# Altium PCB True Variant.PcbDoc
Units mil, origin at the board's own origin, x right, y up, seen from the top; angles counter-clockwise.
Board outline 6000 x 4000 mil, 4 copper layers (Top Layer, Int1 (GND), Int2 Neutral, Bottom Layer), stack 56.912 mil thick; 17 components, 12 nets, 44 pads, 0 vias.
Unrouted connection lines stored in the file: 1.
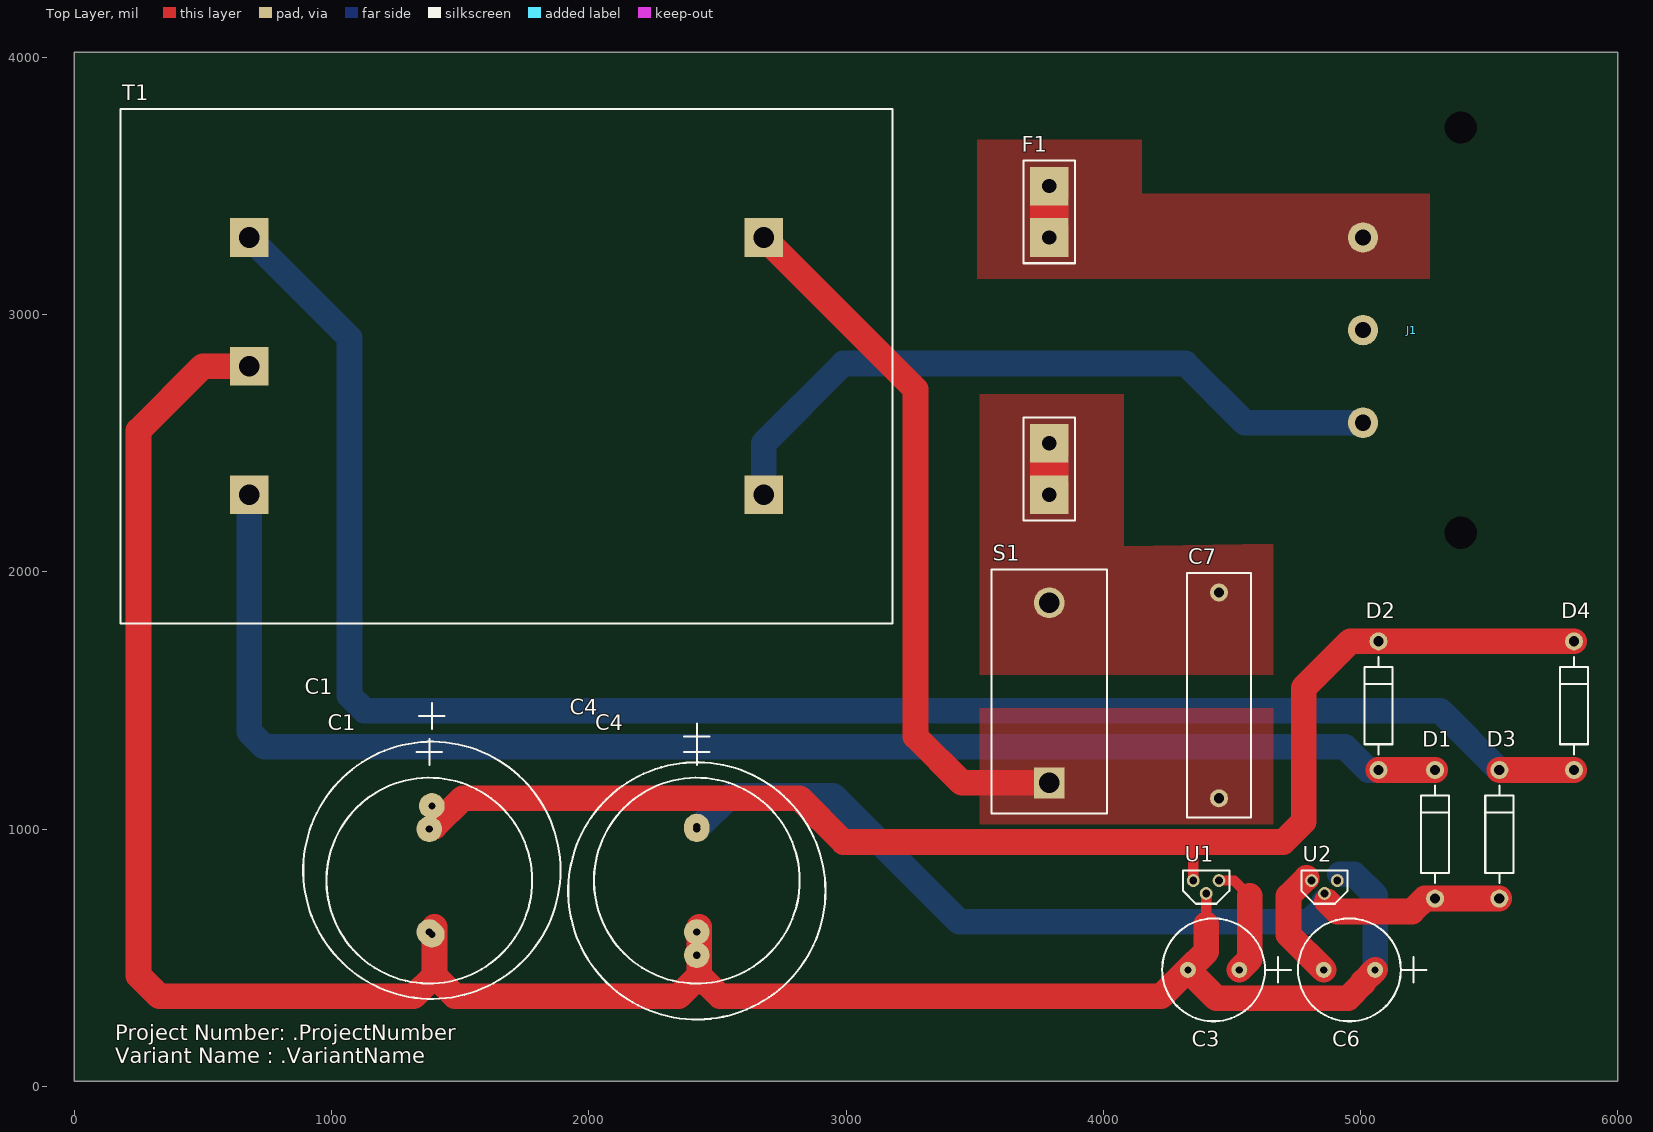
[diagram p0: Top Layer view]
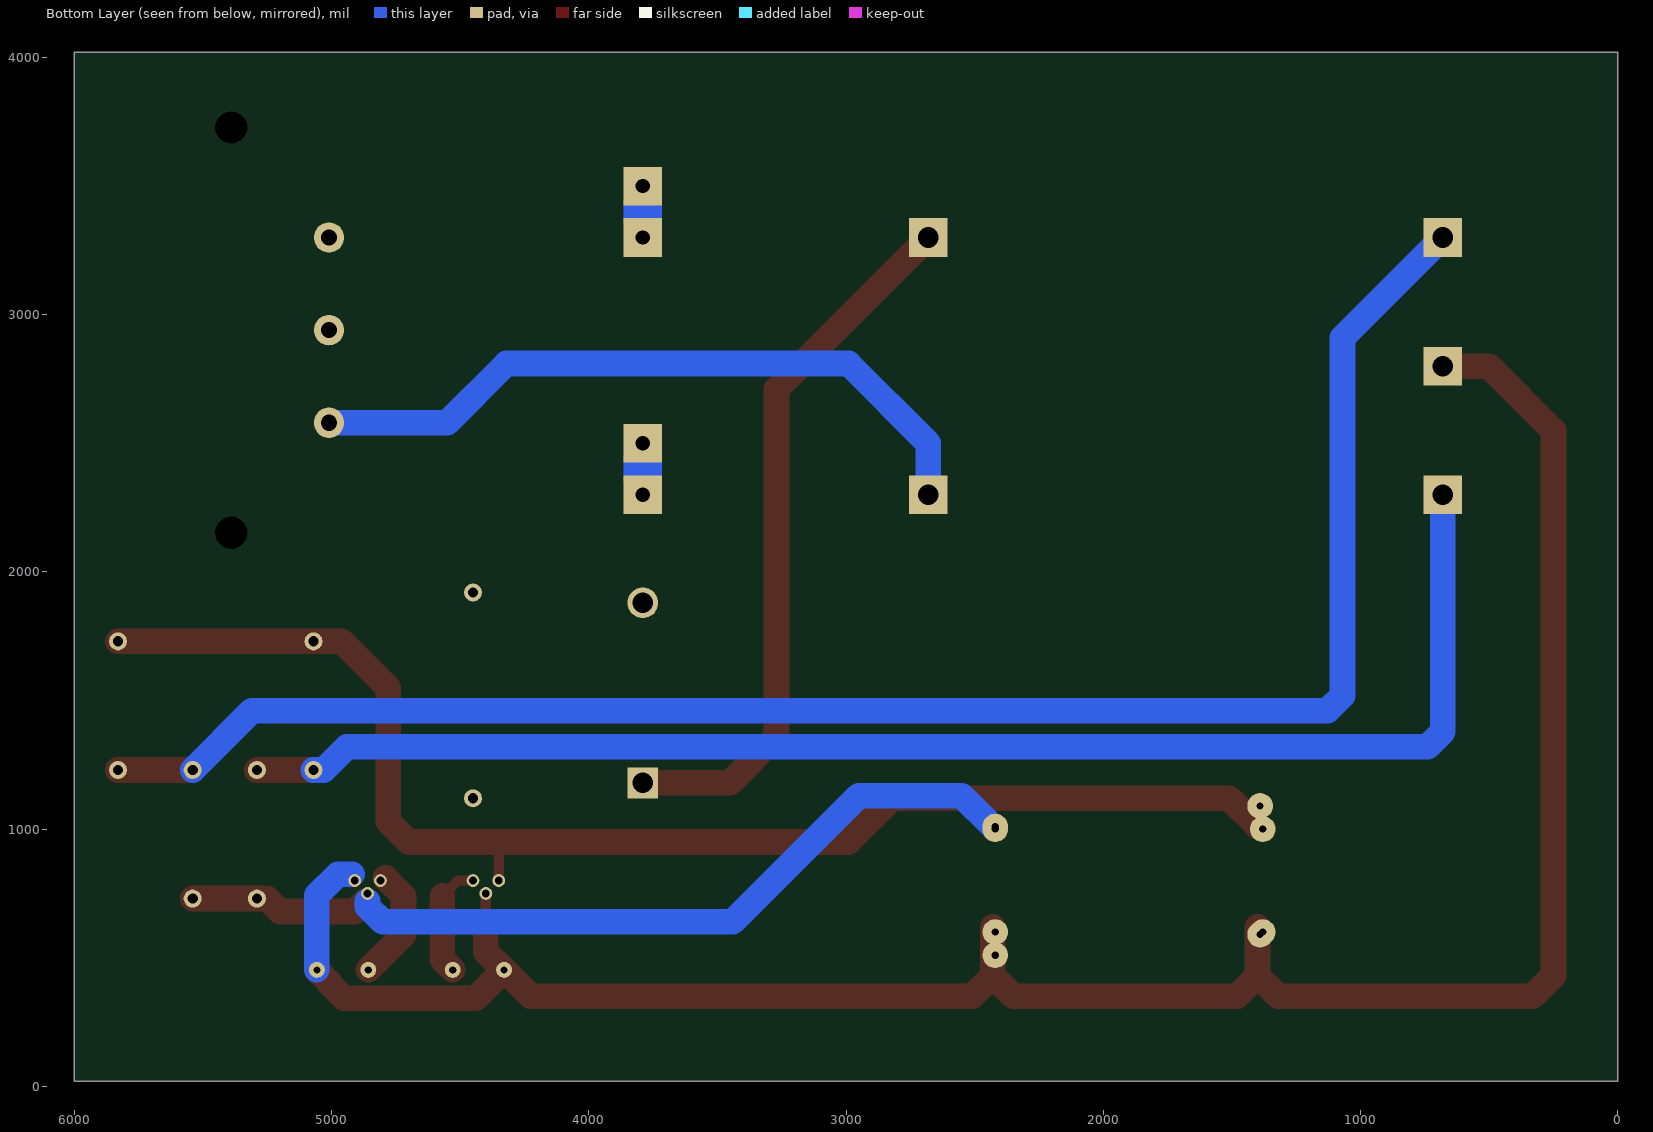
[diagram p1: Bottom Layer view, seen from below]
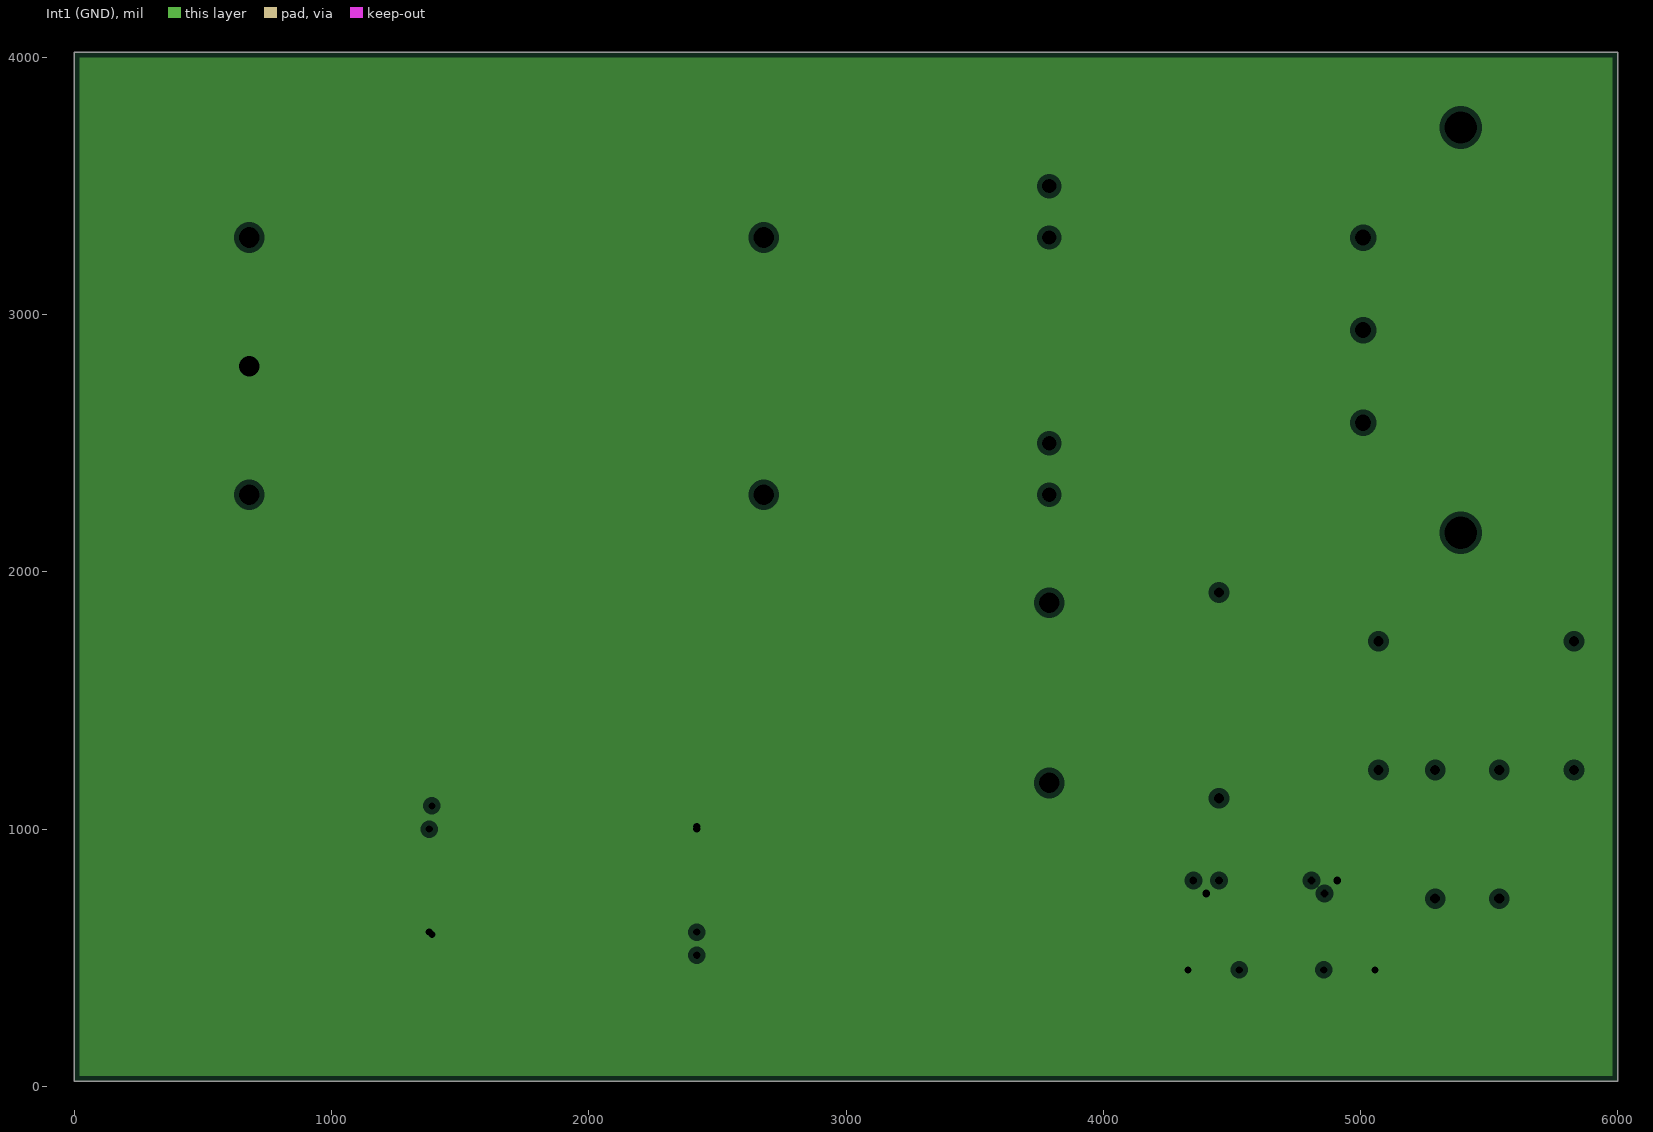
[diagram p2: Int1 (GND), clearances drawn from the general rule]
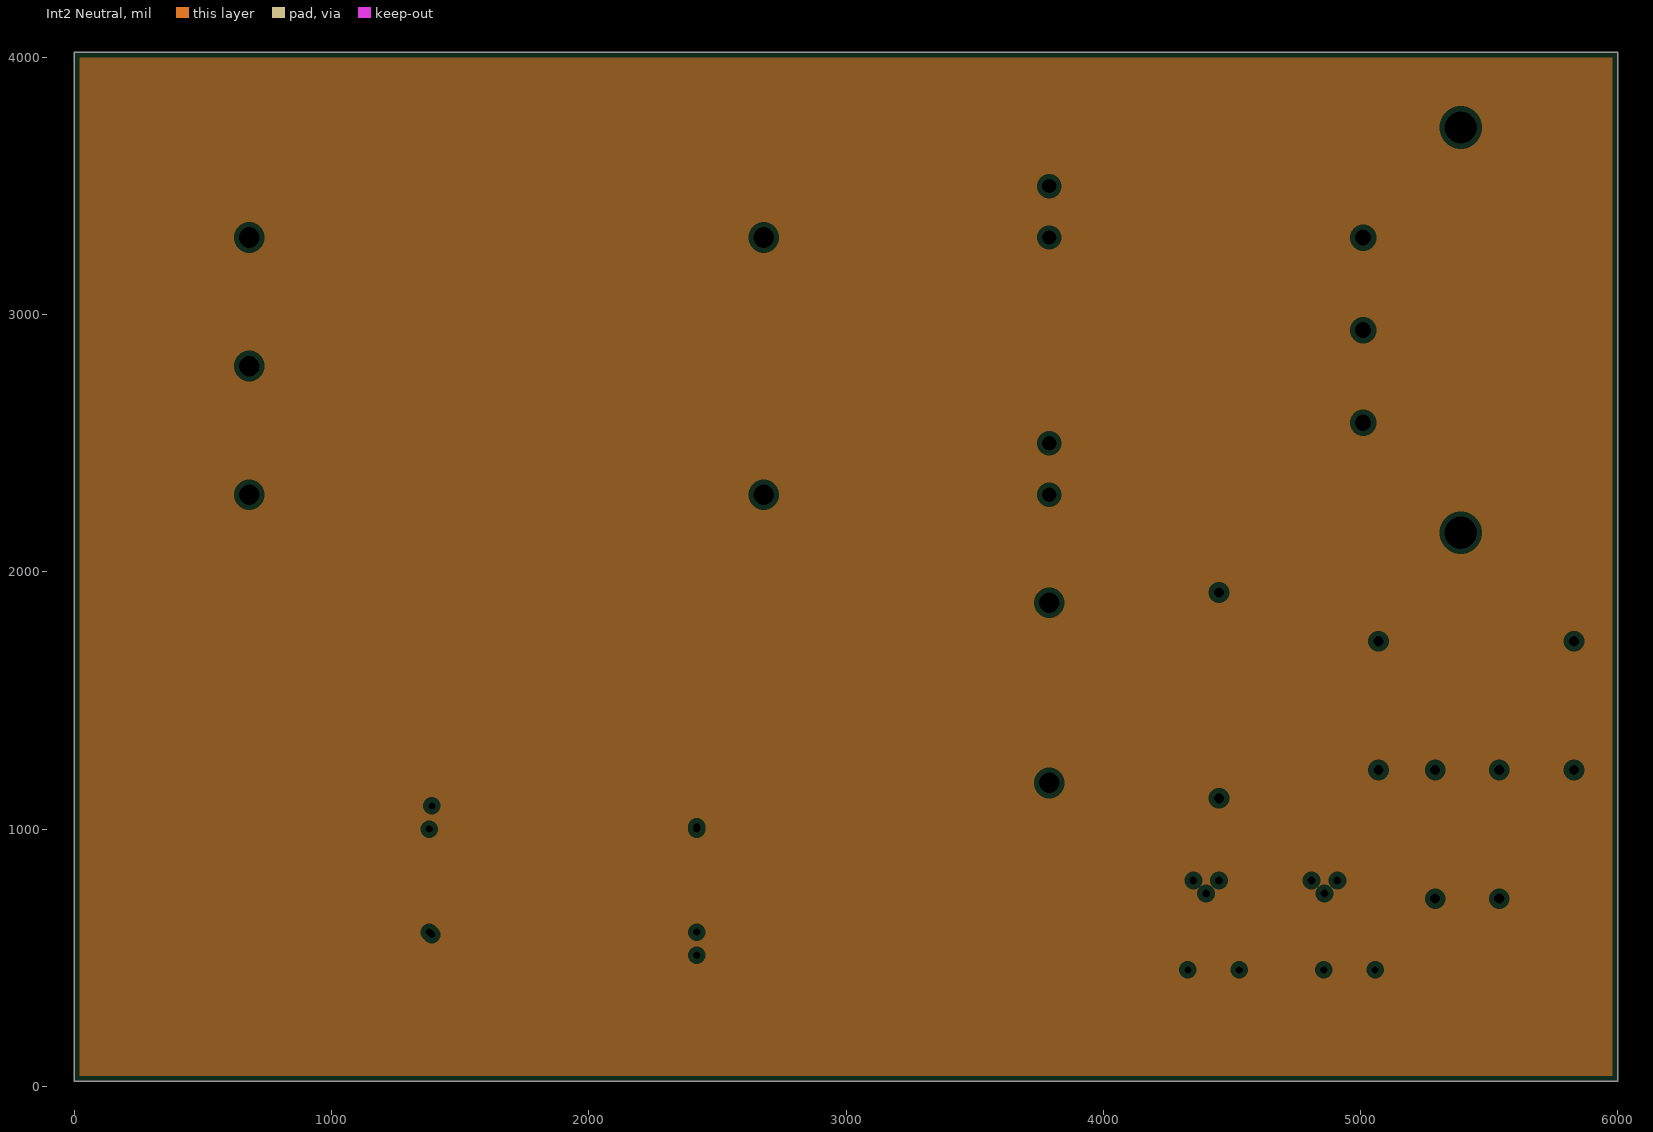
[diagram p3: Int2 Neutral, clearances drawn from the general rule]

## Layer stack, top to bottom
Top Solder: solder mask 1, SM-001, Dk 4
Top Layer: signal copper 1.378
Dielectric 1: prepreg 5.1, PP-017, Dk 4.3
Dielectric 2: prepreg 5.1, PP-017, Dk 4.3
Int1 (GND): plane copper 1.378, net GND
Dielectric 3: core 31, Core-040, Dk 4.6
Int2 Neutral: plane copper 1.378, net NEUTRAL
Dielectric 4: prepreg 5.1, PP-017, Dk 4.3
Dielectric 5: prepreg 5.1, PP-017, Dk 4.3
Bottom Layer: signal copper 1.378
Bottom Solder: solder mask 1, SM-001, Dk 4

## Board outline
0,20 6000,20 6000,4020 0,4020

## Design rules (kind name [scope] priority, off if disabled: settings)
Clearance [All] p1: gap=10 ignorepadtopadclearanceinfootprint=FALSE except(0: Arc-Hole Track-Hole SMDPad-Hole THPad-Hole Via-Hole Fill-Hole Poly-Hole Region-Hole Text-Hole)
ComponentClearance [All] p1: gap=5 collisioncheckmode=3 verticalgap=10 showdistances=FALSE
Height [All] p1: minheight=0 maxheight=3000 prefheight=500
PlaneClearance [All] p1: clearance=20
PlaneConnect [All] p1: planeconnectstyle=Relief reliefexpansion=20 reliefentries=4 reliefconductorwidth=10 reliefairgap=10
PolygonConnect [All] p1: connectstyle=Relief reliefconductorwidth=10 reliefentries=4 polygonreliefangle="90 Angle" airgapwidth=10
RoutingVias [All] p1: holewidth=28 width=50 viastyle="Through Hole" minholewidth=28 minwidth=50 maxholewidth=28 maxwidth=50
SolderMaskExpansion [All] p1: expansion=4 istentingtop=FALSE
SupplyNets "Schematic Supply Nets_3" [InNet('+15V')] p1: voltage=0.000
SupplyNets "Schematic Supply Nets_2" [InNet('CHASSIS')] p2: voltage=0.000
SupplyNets "Schematic Supply Nets_1" [InNet('-15V')] p3: voltage=0.000
SupplyNets "Schematic Supply Nets" [InNet('GND')] p4: voltage=0.000
Width [All] p1: maxlimit=100 minlimit=10 preferedwidth=40
26 further rules are at their usual default settings.

## Classes and differential pairs
component class "True Variant": C1 C3 C4 C6 C7 D1 D2 D3 D4 F1 J1 S1 T1 U1 U2

## Components (designator, comment, footprint, x,y, rotation, side; value= is the part's Value field where it differs from the comment)
C1 "CAP2000uF" RB.5_1.0 1390,1090 r90 top
C1 "CAP1000uF" RB.4_.8 1380,1000 r90 top value=1mF
C3 "CAP Polar 10uF" RB.2_.4 4529,453 r0 top value=10µF
C4 "CAP2000uF" RB.5_1.0 2420,1010 r90 top
C4 "CAP1000uF" RB.4_.8 2420,1000 r90 top value=1mF
C6 "CAP Polar 10uF" RB.2_.4 5057,453 r0 top value=10µF
C7 "CAP" RAD0.8 4450,1120 r90 top
D1 "1N4004" DIODE0.5 5290,730 r90 top
D2 "1N4004" DIODE0.5 5070,1230 r90 top
D3 "1N4004" DIODE0.5 5540,730 r90 top
D4 "1N4004" DIODE0.5 5830,1230 r90 top
F1 "FUSE" FUSE 3790,3500 r270 top
J1 "Bulgin PX0580PC" "Bulgin PX0580PC" 5010,2940.16 r0 top
S1 "SW SPST" SW-MAINS 3790,1180 r90 top
T1 "120VAC" TRANSFORMER 2680,3300 r180 top
U1 "78L15" TO-92A 4350,800 r0 top
U2 "79L15" TO-92A 4810,800 r0 top

## Footprints (in the part's own frame and the unit in brackets; to place one, negate y for a bottom-side part, rotate by r counter-clockwise, add the part's x,y. Pads: shape width x height; smd on the part's side, far side on the other; paste and mask are expansions set on the pad)
"Bulgin PX0580PC" [mm] "Bulgin PX0580PC"
  round 3 hole 1.6: 1(0,9.14) 2(0,-0.004) 3(0,-9.148)
  oval 0x1.524 hole 3.2: 4(9.65,20) 5(9.65,-20)
  body extent -4.25,-24.9 21.55,24.9, height 27.81
DIODE0.5 [mil]
  round 70 hole 40: 1(0,0) 2(500,0)
  silkscreen extent 60,-55 440,55, body extent -17,-56 517,50, height 113
FUSE [mil]
  rect 150x150 hole 55: 1(0,0) 1(200,0) 2(1000,0) 2(1200,0)
  Top Layer region: 1150,75 1050,75 1050,-75 1150,-75
  Top Layer region: 150,75 50,75 50,-75 150,-75
  Bottom Layer region: 1150,75 1050,75 1050,-75 1150,-75
  Bottom Layer region: 150,75 50,75 50,-75 150,-75
  silkscreen extent -100,-100 1300,100, body extent -8,-116 1208,116, height 348
RAD0.8 [mil]
  round 70 hole 40: 1(0,0) 2(800,0)
  silkscreen extent -75,-125 875,125, body extent -79,-129 879,129, height 787
RB.2_.4 [mil]
  round 62 hole 28: 1(0,0) 2(-200,0)
  silkscreen extent -300,-200 200,200, body extent -300,-200 100,200, height 500
RB.4_.8 [mil]
  round 100 hole 28: 1(0,0) 2(-400,0)
  silkscreen extent -600,-400 350,400, body extent -600,-400 200,400, height 850
RB.5_1.0 [mil]
  round 100 hole 28: 1(0,0) 2(-500,0)
  silkscreen extent -750,-500 400,500, body extent -750,-500 250,500, height 850
SW-MAINS [mil]
  rect 120x120 hole 80: 1(0,0)
  round 120 hole 80: 2(700,0)
  silkscreen extent -120,-225 830,225, body extent -124,-229 834,229, height 300
TO-92A [mil]
  round 50 hole 30: 1(0,0) 2(50,-50) 3(100,0)
  silkscreen extent -40,-90 140,40, body extent -40,-90 140,40, height 157
TRANSFORMER [mil]
  rect 150x150 hole 80: 1(0,0) 2(0,1000) 3(2000,1000) 4(2000,500) 5(2000,0)
  silkscreen extent -500,-500 2500,1500, body extent -504,-504 2504,1504, height 1969

## Part data
C1 C4: library part CMP-001-00085-7, "Bi-Polar Capacitor 2000uF / 2mF"
C1 C4: library part CMP-001-00084-6, "Bi-Polar Capacitor", Capacitor Type=Bi-Polar, Case/Package=RB.4/.8, Design Item ID=CAP1000uF, Mounting Technology=THT, Pins=2, Source="True Variant.SCHLIB"
C3 C6: library part CMP-001-00087-4, "CAP-Polar 10uF", Capacitor Type=Bi-Polar, Case/Package=RB.2/.4, Mounting Technology=THT, Pins=2
C7: library part CMP-001-00083-3, "1nF / 2kV", Design Item ID=CAP, Source="True Variant.SCHLIB"
D1 D2 D3 D4: library part CMP-004-00031-4, Case/Package=Diode0.5, Design Item ID=1N4004, Pins=2, RoHS Compliant=No, Source="True Variant.SCHLIB"
F1: library part CMP-005-00013-4, "Fuse", Current Rating=1A, Case/Package=Fuse, Design Item ID=FUSE, Source="True Variant.SCHLIB"
J1: library part CMP-002-00078-1, Max Current Rating=10A, Voltage Rating=250V, Connector Type=Power, Gender=Male, Mounting Technology=Panel,Board, Pins=3, RoHS Compliant=Yes
S1: library part CMP-009-000000-5, "Main Switch", Current Rating=1A, Max Current Rating=10A, Design Item ID="SW SPST", Source="True Variant.SCHLIB"
T1: library part CMP-012-00000-4, "Center-Tapped Transformer", Voltage Rating=120V, Design Item ID=120VAC, Mounting Technology=THT, Pins=5, Source="True Variant.SCHLIB"
U1: library part CMP-011-000000-4, "Very Low Drop Voltage Regulators With Inhibit", Case/Package=TO-92A, Output Voltage=15V, Design Item ID=78L15, Mounting Technology=THT, Pins=3, Source="True Variant.SCHLIB"
U2: library part CMP-011-000001-4, "Very Low Drop Voltage Regulators With Inhibit", Case/Package=TO-92A, Output Voltage=-15V, Design Item ID=79L15, Mounting Technology=THT, Pins=3, Source="True Variant.SCHLIB"

## Nets (pads, with @x,y where several pads share a name; then routed paths per layer and width w, separated by ;. In a path a pad name is that pad's centre, name@x,y a point inside that pad or via, vN(x,y) a via of type N, cw(c..) or ccw(c..) an arc to the next point about the centre after c; other vN are vias at no path point)
+15V: C3.1 U1.3 | length 448.8
  Top Layer w40: U1.3 4510,800 4570,740
  Top Layer w100: C3.1 4570,494 4570,740
-15V: C6.2 U2.1 | length 442.7
  Top Layer w100: U2.1@4790,810 4720,740 4720,590 C6.2
A_FUSE: C7.2 F1.2 S1.2
A_IN: F1.1 J1.1
A_SWITCH: C7.1 S1.1 T1.1 | length 2778.9
  Top Layer w100: T1.1 3270,2710 3270,1360 3450,1180 S1.1
CHASSIS: J1.2
GND: C1.2 C3.2 C4.1 C6.1 T1.4 U1.2 U2.3 | length 8930
  Top Layer w40: 4400,630 U1.2
  Top Layer w100: T1.4 500,2800 250,2550 250,430 330,350 1320,350 1400,430 ; C1.2@1400,620 1400,430 ; 2430,620 2430,430 ; 4400,630 4400,524 C3.2 ; C6.1 5010,406 5010,401.58 4951.42,343 4439,343 C3.2 ; 1400,430 1480,350 2350,350 2430,430 ; 2430,430 2510,350 4226,350 C3.2
  Bottom Layer w100: 4920,825 4975,825 5057,743 C6.1
LTAP: D1.2 D2.1 T1.3 | length 5593
  Top Layer w100: D2.1 D1.2
  Bottom Layer w100: T1.3 680,1378.58 738.58,1320 4940,1320 5030,1230 D2.1
NEUTRAL: J1.3 T1.2 | length 2753.7
  Bottom Layer w100: T1.2 2680,2500 2990,2810 4320,2810 4550,2580 J1.3
OH: C1.1 D2.2 D4.2 U1.1 | length 5319.1
  Top Layer w40: U1.1@4350,804.62 4350,950
  Top Layer w100: C1.1@1400,1010 1510,1120 2820,1120 2990,950 4350,950 4700,950 4780,1030 4780,1550 4960,1730 D2.2 D4.2
RTAP: D3.2 D4.1 T1.5 | length 6822.5
  Top Layer w100: D3.2 D4.1
  Bottom Layer w100: T1.5 1070,2910 1070,1518.58 1128.58,1460 5310,1460 D3.2
UH: C4.2 D1.1 D3.1 U2.2 | length 3438.3
  Top Layer w40: U2.2 U2.2@4862.71,750
  Top Layer w100: 4870,720 4910,680 5200,680 5250,730 D1.1 D3.1
  Bottom Layer w100: 2430,1010 2550,1130 2950,1130 3440,640 4801.42,640 4860,698.58 4860,720
pads on no net: J1.4 J1.5

## Polygon pours and split planes (outlines as drawn)
A_SWITCH on Top Layer "A_SWITCH_L01_P003" (solid, pour order 3): 3520,1470 3520,1020 4660,1020 4660,1470
A_FUSE on Top Layer "A_FUSE_L01_P000" (solid, pour order 0): 3520,2690 3520,1600 4660,1600 4660,2110 4080,2100 4080,2690
A_IN on Top Layer "A_IN_L01_P001" (solid, pour order 1): 3510,3680 3630,3680 4150,3680 4150,3470 4270,3470 5270,3470 5270,3140 3510,3140
GND on Int1 (GND) (split plane): 5979.9,40.1 20.1,40.1 20.1,3999.9 5979.9,3999.9
no net on Int2 Neutral (split plane): 5979.9,40.1 20.1,40.1 20.1,3999.9 5979.9,3999.9

## Silkscreen, mask and mechanical layers (free items; w line width, h text height)
Top Overlay:
  text "Project Number: .ProjectNumber / Variant Name : .VariantName" at 160,90 h60